# Altium PCB machin.PcbDoc
Units mil, origin at the board's own origin, x right, y up, seen from the top; angles counter-clockwise.
Board outline 5511.81 x 3543.31 mil, 2 copper layers (Top Layer, Bottom Layer); 28 components, 36 nets, 129 pads, 2 vias.
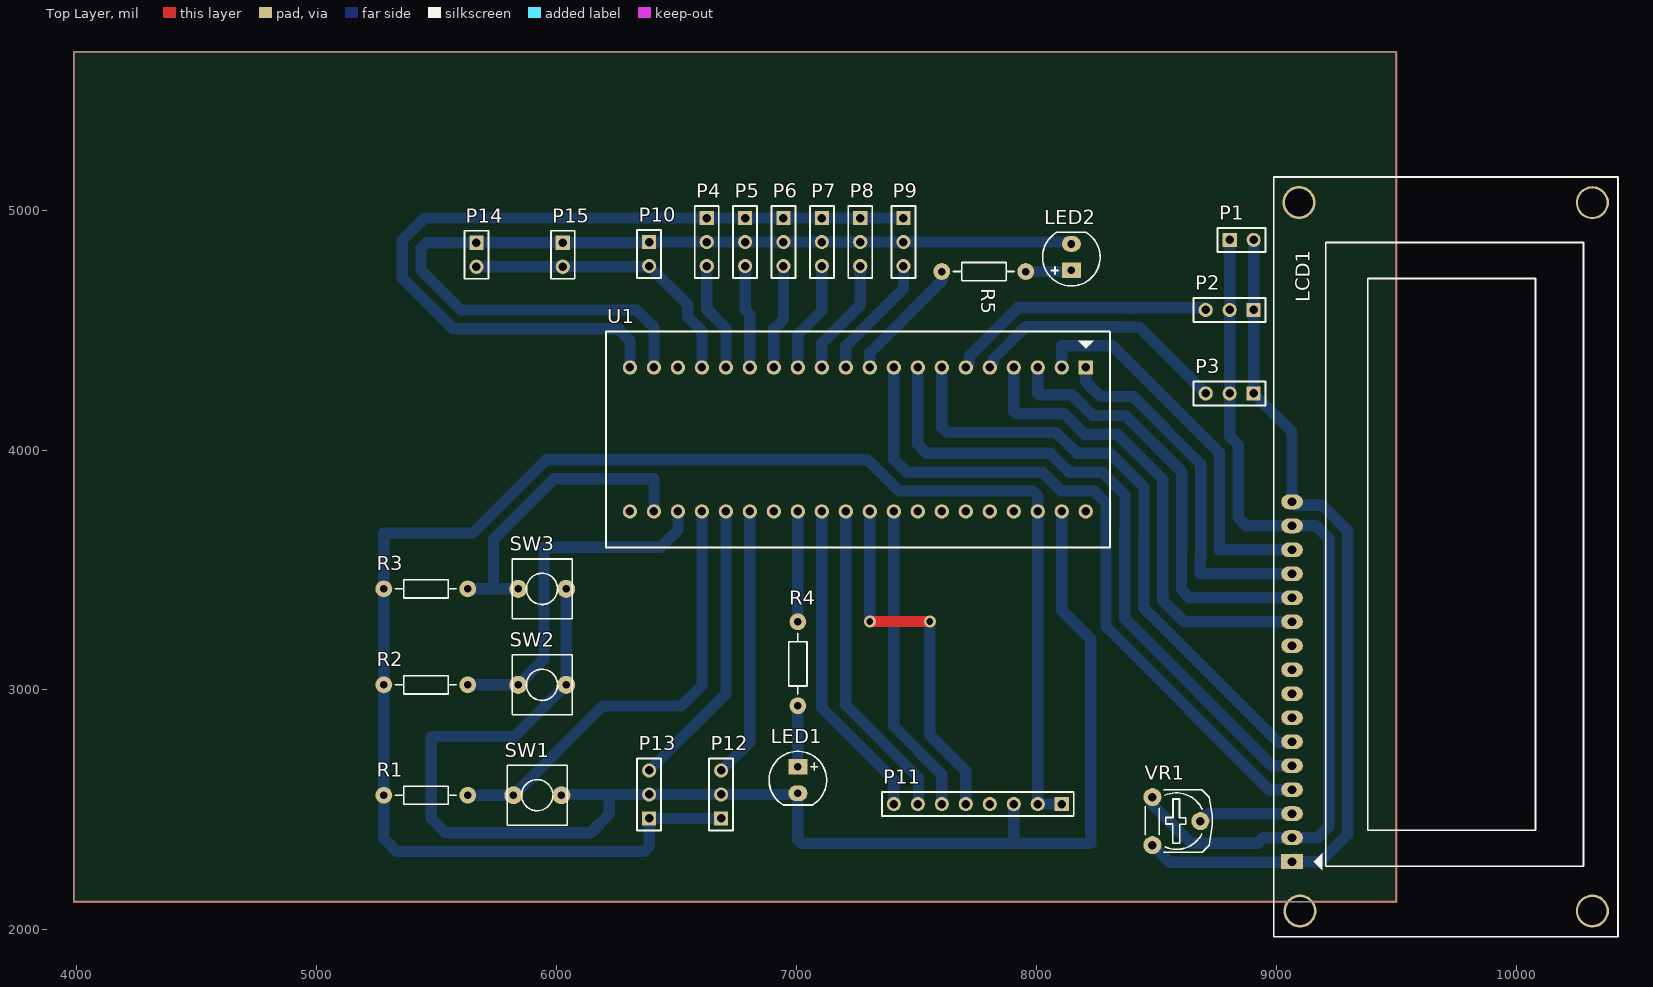
[diagram p0: Top Layer view]
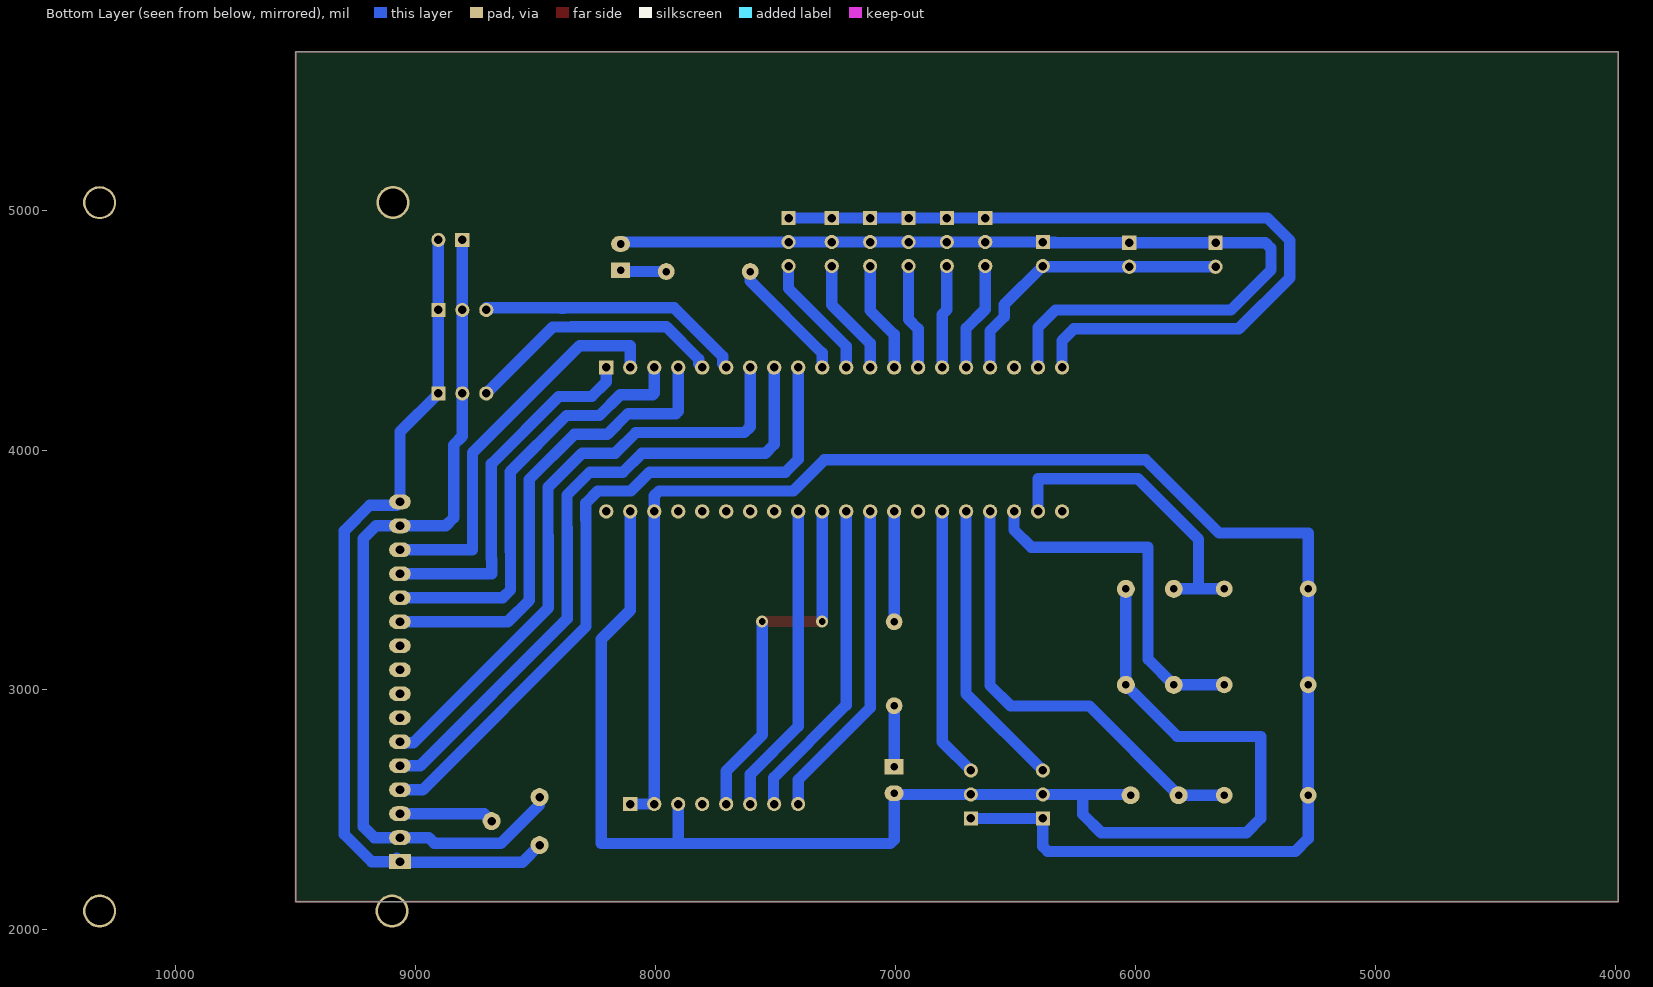
[diagram p1: Bottom Layer view, seen from below]

## Layer stack, top to bottom
Top Layer: signal copper 1.4
Dielectric: dielectric 12.6, FR-4, Dk 4.8
Bottom Layer: signal copper 1.4

## Board outline
3988.1,2116.1 9499.91,2116.1 9499.91,5659.41 3988.1,5659.41

## Design rules (kind name [scope] priority, off if disabled: settings)
Clearance [All] p1: gap=31.5
PolygonConnect [All] p1: connectstyle=Relief reliefconductorwidth=10 reliefentries=4 polygonreliefangle="90 Angle"
RoutingLayers [All] p1: top layer_v5=FALSE bottom layer_v5=TRUE
RoutingVias [All] p1: holewidth=28 width=50 viastyle="Through Hole" minholewidth=28 minwidth=50 maxholewidth=28 maxwidth=50
SilkscreenOverComponentPads [All] p1: minsilkscreentomaskgap=10
SolderMaskExpansion [All] p1: expansion=4
Width NET [All] p1: maxlimit=47.24 minlimit=47.24 preferedwidth=47.24
26 further rules are at their usual default settings.

## Components (designator, comment, footprint, x,y, rotation, side; value= is the part's Value field where it differs from the comment)
LCD1 "LCD_16x2" LCD16X2 9066,2284 r90 top
LED1 "LED_Ban_Dem" LED-5 7006,2624 r270 top
LED2 "LED_Nguon" LED-5 8146,4804 r90 top
P1 "5V" HDR1X2 8806,4876 r0 top
P2 "Servo_Ra" HDR1X3 8906,4584 r180 top
P3 "Servo_Vao" HDR1X3 8906,4236 r180 top
P4 "Vi_tri_6" HDR1X3 6626,4967 r270 top
P5 "Vi_tri_5" HDR1X3 6786,4967 r270 top
P6 "Vi_tri_4" HDR1X3 6946,4967 r270 top
P7 "Vi_tri_3" HDR1X3 7106,4967 r270 top
P8 "Vi_tri_2" HDR1X3 7266,4967 r270 top
P9 "Vi_tri_1" HDR1X3 7446,4967 r270 top
P10 "Coi_Bao_1" HDR1X2 6386,4867 r270 top
P11 "RC522" HDR1X8 8106,2524 r180 top
P12 "SS_Ban_Dem" HDR1X3 6686,2464 r90 top
P13 "SS_Lua" HDR1X3 6386,2464 r90 top
P14 "Coi_Bao_2" HDR1X2 5666,4864 r270 top
P15 "Den_Bao" HDR1X2 6026,4864 r270 top
R1 "1k" R1/4W 5280,2561 r0 top
R2 "1k" R1/4W 5280,3021 r0 top
R3 "1k" R1/4W 5280,3421 r0 top
R4 "1k" R1/4W 7006,3284 r270 top
R5 "1k" R1/4W 7606,4744 r0 top
SW1 "BTN_Back" SW2 5820,2561 r0 top
SW2 "BTN_Menu" SW2 5840,3021 r0 top
SW3 "BTN_Exit" SW2 5840,3421 r0 top
U1 "STM32F103C8T6" STM32L103C8_mini 8206,4344 r270 top
VR1 "100K" VR 8484,2553 r270 top

## Footprints (in the part's own frame and the unit in brackets; to place one, negate y for a bottom-side part, rotate by r counter-clockwise, add the part's x,y. Pads: shape width x height; smd on the part's side, far side on the other; paste and mask are expansions set on the pad)
HDR1X2 [mm] "Connector; Header; 2 Position"
  rect 1.5x1.5 hole 0.9: 1(0,0)
  round 1.5 hole 0.9: 2(2.54,0)
  silkscreen extent -1.27,-1.27 3.81,1.27
HDR1X3 [mm] "Connector; Header; 3 Position"
  rect 1.5x1.5 hole 0.9: 1(0,0)
  round 1.5 hole 0.9: 2(2.54,0) 3(5.08,0)
  silkscreen extent -1.27,-1.27 6.35,1.27
HDR1X8 [mm] "Connector; Header; 8 Position"
  rect 1.5x1.5 hole 0.9: 1(0,0)
  round 1.5 hole 0.9: 2(2.54,0) 3(5.08,0) 4(7.62,0) 5(10.16,0) 6(12.7,0) 7(15.24,0) 8(17.78,0)
  silkscreen extent -1.27,-1.27 19.05,1.27
LCD16X2 [mil] "LCD dipslay 16x2, 16 pin"
  rect 62x90 hole 36: 1(0,0)
  oval 62x90 hole 36: 2(100,0) 3(200,0) 4(300,0) 5(400,0) 6(500,0) 7(600,0) 8(700,0) 9(800,0) 10(900,0) 11(1000,0) 12(1100,0) 13(1200,0) 14(1300,0) 15(1400,0) 16(1500,0)
  round 137.8 hole 118.11: "Hole 0"(-206,-33) "Hole 0"(-206,-1252) "Hole 0"(2747,-1252) "Hole 0"(2748,-29)
  silkscreen extent -313,-1359 2854,76, body extent -315,-1360 2855,77, height 414
LED-5 [mil] "LED 2 PIN, 5 ly , Only colour, pin to pin 110mil"
  rect 65x80 hole 32: 1(-55,0)
  oval 65x80 hole 32: 2(55,0)
  silkscreen extent -120,-120 104,120, body extent -100,-101 101,100, height 339
R1/4W [mil] "R 1/4W, 2 Pin, 350mil"
  round 70 hole 31: 1(0,0) 2(350,0)
  silkscreen extent 48,-38 302,38, body extent -40,-47 386,47, height 111
STM32L103C8_mini [mil] "STM32L103C8_mini Board"
  rect 60x60 hole 35.43: 1(0,0)
  round 60 hole 35.43: 2(0,-100) 3(0,-200) 4(0,-300) 5(0,-400) 6(0,-500) 7(0,-600) 8(0,-700) 9(0,-800) 10(0,-900) 11(0,-1000) 12(0,-1100) 13(0,-1200) 14(0,-1300) 15(0,-1400) 16(0,-1500) 17(0,-1600) 18(0,-1700) 19(0,-1800) 20(0,-1900) 21(600,-1900) 22(600,-1800) 23(600,-1700) 24(600,-1600) 25(600,-1500) 26(600,-1400) 27(600,-1300) 28(600,-1200) 29(600,-1100) 30(600,-1000) 31(600,-900) 32(600,-800) 33(600,-700) 34(600,-600) 35(600,-500) 36(600,-400) 37(600,-300) 38(600,-200) 39(600,-100) 40(600,0)
  silkscreen extent -150,-2000 750,101
SW2 [mil] "SW button 2pin, 250x 250 mil"
  round 75 hole 31: 1(0,0) 2(200,0)
  silkscreen extent -25,-125 225,125, body extent -46,-125 265,119, height 276
VR [mil] "Resistor Variable"
  round 75 hole 35: 1(0,0) 2(100,200) 3(200,0)
  silkscreen extent -31,-30 230,250

## Part data
LCD1: library part LCD16x2, "LCD dipslay 16 char, 2 line"
LED1 LED2: library part LED, "LED Single colour Green and Red"
P1 P10 P14 P15: library part "Header 2", "Header, 2-Pin"
P2 P3 P4 P5 P6 P7 P8 P9 P12 P13: library part "Header 3", "Header, 3-Pin"
P11: library part "Header 8", "Header, 8-Pin"
R1 R2 R3 R4 R5: library part R1/4W, "Resistor 1/4W"
SW1 SW2 SW3: library part SW2, "Switch button 2 pin"
U1: library part STM32L103C8_mini, "STM32F103C8T6 Mini Board"
VR1: library part VR, "Var Resistor"

## Via types
v1: diameter 50, hole 28, Top Layer to Bottom Layer, 2 vias

## Nets (pads, with @x,y where several pads share a name; then routed paths per layer and width w, separated by ;. In a path a pad name is that pad's centre, name@x,y a point inside that pad or via, vN(x,y) a via of type N, cw(c..) or ccw(c..) an arc to the next point about the centre after c; other vN are vias at no path point)
NetLCD1_1: LCD1.1 LCD1.16 P1.2 P2.1 P3.1 VR1.3 | length 3617
  Bottom Layer w47.24: VR1.3 8555.36,2281.64 9063.64,2281.64 LCD1.1 ; P1.2 8906,4576 P3.1 9066,4076 LCD1.16 9079.88,3770.12 9191.24,3770.12 9297.74,3663.62 9297.74,2397.38 9184.36,2284 LCD1.1 ; LCD1.1@9079.88,2297.88 LCD1.1
NetLCD1_2: LCD1.2 LCD1.15 P1.1 P2.2 P3.2 VR1.1 | length 3649.9
  Bottom Layer w47.24: VR1.1 8484,2521 8644.62,2360.38 8922.38,2360.38 8946,2384 LCD1.2 9173,2384 9219,2430 9219,3631 9166,3684 LCD1.15 8875,3684 8842.3,3716.7 8842.3,4021.06 8806,4057.36 P3.2 P2.2 P1.1
NetLCD1_3: LCD1.3 VR1.2 | length 394.8
  Bottom Layer w47.24: VR1.2 8715,2484 LCD1.3
NetLCD1_4: LCD1.4 U1.9 | length 2916.4
  Bottom Layer w47.24: U1.9 7406,3961 7459.03,3907.97 8024.96,3907.97 8103.82,3829.12 8241.26,3829.12 8291.12,3779.26 8291.12,3708.74 8290.27,3707.89 8290.27,3264.02 8970.29,2584 LCD1.4
NetLCD1_5: LCD1.5 U1.8 | length 2738.6
  Bottom Layer w47.24: U1.8 7506,4023 7542.28,3986.72 8057.57,3986.72 8136.43,3907.86 8273.87,3907.86 8369.86,3811.87 8369.86,3676.13 8369.04,3675.31 8369.04,3296.61 8981.64,2684 LCD1.5
NetLCD1_6: LCD1.6 U1.7 | length 2550.6
  Bottom Layer w47.24: U1.7 7606,4097 7630,4073 8082.64,4073 8169.05,3986.6 8306.49,3986.6 8448.6,3844.49 8448.6,3643.51 8447.78,3642.69 8447.78,3341.22 9009.5,2779.5 9061.5,2779.5 LCD1.6
NetLCD1_11: LCD1.11 U1.4 | length 2002.1
  Bottom Layer w47.24: U1.4 7906,4161.26 7915.52,4151.74 8115.26,4151.74 8201.66,4065.34 8339.1,4065.34 8527.34,3877.1 8527.34,3610.9 8526.52,3610.08 8526.52,3373.84 8616.36,3284 LCD1.11
NetLCD1_12: LCD1.12 U1.3 | length 1868.8
  Bottom Layer w47.24: U1.3 8006,4236 8011.52,4230.48 8147.88,4230.48 8234.28,4144.08 8371.72,4144.08 8606.08,3909.72 8606.08,3578.28 8605.26,3577.46 8605.26,3416.74 8638,3384 8850,3384 ; 8792,3384 8850,3384 ; LCD1.12 8850,3384
NetLCD1_13: LCD1.13 U1.1 | length 1521.2
  Bottom Layer w47.24: U1.1 8206,4283.71 8266.89,4222.82 8404.33,4222.82 8684.82,3942.33 8684.82,3545.67 8684,3544.85 8684,3484 LCD1.13
NetLCD1_14: LCD1.14 U1.2 | length 1640.4
  Bottom Layer w47.24: U1.2 8106,4435 8317,4435 8763.56,3988.44 8763.56,3584 LCD1.14
NetLED1_1: LED1.1 R4.2 | length 255
  Bottom Layer w47.24: LED1.1 R4.2
NetLED1_2: LED1.2 P11.3 P12.2 P13.2 SW1.2 SW2.2 SW3.2 U1.39 | length 6274.4
  Bottom Layer w47.24: SW1.2 6023,2564 6220,2564 ; SW3.2 SW2.2 5825,2806 5478,2806 5478,2463.74 5537,2404.74 6142.74,2404.74 6220,2482 6220,2564 ; P11.3 7906,2360 7021,2360 7006,2375 LED1.2 7001,2564 P12.2 P13.2 6220,2564 ; 7914,2360 8227,2360 8227,3211 8106,3332 U1.39
NetLED2_1: LED2.1 R5.2 | length 192.1
  Bottom Layer w47.24: R5.2 8141,4744 LED2.1
NetLED2_2: LED2.2 P4.2 P5.2 P6.2 P7.2 P8.2 P9.2 P10.1 P14.1 P15.1 U1.19 | length 4109.4
  Bottom Layer w47.24: 6336,4867 P10.1 ; U1.19@6411,4349 U1.19 6406,4511 6333,4584 5602,4584 5435,4751 5435,4840.64 5458.36,4864 P14.1 P15.1 6383,4864 P10.1 ; LED2.2 8138,4867 P9.2 P8.2 P7.2 P6.2 P5.2 P4.2 P10.1
NetP2_3: P2.3 U1.6 | length 1133.2
  Bottom Layer w47.24: U1.6 7720.88,4358.88 7720.88,4390.61 7922.75,4592.48 8382.23,4592.48 ; 8393.48,4591.48 8383.23,4591.48 8382.23,4592.48 ; P2.3@8706,4592.48 8382.23,4592.48
NetP3_3: P3.3 U1.5 | length 1097.3
  Bottom Layer w47.24: U1.5 7820.88,4358.88 7820.88,4379.26 7955.36,4513.74 8349.62,4513.74 8350.62,4512.74 8429.26,4512.74 P3.3
NetP4_1: P4.1 P5.1 P6.1 P7.1 P8.1 P9.1 U1.20 | length 3609.7
  Bottom Layer w47.24: 5732,4967 5807,4967 ; 5889,4967 5945,4967 ; 6286,4967 6311,4967 ; U1.20 6306,4455.74 6256.48,4505.26 5569.38,4505.26 5356.26,4718.38 5356.26,4873.26 5450,4967 5807,4967 ; P9.1 P8.1 P7.1 P6.1 P5.1 P4.1 6311,4967 ; 5807,4967 5945,4967 ; 5945,4967 6311,4967
NetP4_3: P4.3 U1.16 | length 456.1
  Bottom Layer w47.24: P4.3 6626,4587 6706,4507 U1.16
NetP5_3: P5.3 U1.15 | length 431.3
  Bottom Layer w47.24: P5.3 6786,4585 6806,4565 U1.15
NetP6_3: P6.3 U1.14 | length 439.6
  Bottom Layer w47.24: U1.14 6906,4505 6946,4545 P6.3
NetP7_3: P7.3 U1.13 | length 464.4
  Bottom Layer w47.24: U1.13 7006,4482 7106,4582 P7.3
NetP8_3: P8.3 U1.12 | length 489.3
  Bottom Layer w47.24: U1.12 7106,4445 7266,4605 P8.3
NetP9_3: P9.3 U1.11 | length 522.4
  Bottom Layer w47.24: U1.11 7206,4433 7446,4673 P9.3
NetP10_2: P10.2 P14.2 P15.2 U1.17 | length 1235.4
  Bottom Layer w47.24: P14.2 P15.2 6383,4764 P10.2 6547.26,4605.74 6547.26,4554.38 6606,4495.64 U1.17
NetP11_1: P11.1 P11.2 P12.1 P13.1 R1.1 R2.1 R3.1 U1.38 | length 7127.6
  Bottom Layer w47.24: P12.1 P13.1 6386,2347 6365,2326 5334,2326 5280,2380 R1.1 R2.1 R3.1 5280,3654.17 5651.81,3654.17 5956.38,3958.74 7296.9,3958.74 7426.41,3829.23 7986,3829.23 8006,3809.23 U1.38 P11.2 P11.1
NetP11_5: P11.5 U1.31 | length 1532.1
  Top Layer w47.24: v1(7306,3285) v1(7556,3285)
  Bottom Layer w47.24: v1(7306,3285) U1.31 ; v1(7556,3285) 7556,2812 7706,2662 P11.5
NetP11_6: P11.6 U1.32 | length 1302.8
  Bottom Layer w47.24: U1.32 7406,2847.71 7606,2647.71 P11.6
NetP11_7: P11.7 U1.30 | length 1346.7
  Bottom Layer w47.24: U1.30 7206,2936.36 7509,2633.36 7509,2527 P11.7
NetP11_8: P11.8 U1.29 | length 1344.3
  Bottom Layer w47.24: U1.29 7106,2925 7406,2625 P11.8
NetP12_3: P12.3 U1.26 | length 1129.7
  Bottom Layer w47.24: P12.3 6806,2784 U1.26
NetP13_3: P13.3 U1.25 | length 1212.5
  Bottom Layer w47.24: P13.3 6706,2984 U1.25
NetR1_2: R1.2 SW1.1 U1.24 | length 1890.7
  Bottom Layer w47.24: R1.2 SW1.1 6192,2933 6520,2933 6606,3019 U1.24
NetR2_2: R2.2 SW2.1 U1.23 | length 1493.9
  Bottom Layer w47.24: R2.2 SW2.1 5947.38,3128.38 5947.38,3595 6434,3595 6506,3667 U1.23
NetR3_2: R3.2 SW3.1 U1.22 | length 1326.4
  Bottom Layer w47.24: R3.2 5737,3421 ; SW3.1 5737,3421 ; U1.22 6406,3880 5989,3880 5737,3628 5737,3421
NetR4_1: R4.1 U1.28 | length 460
  Bottom Layer w47.24: R4.1 U1.28
NetR5_1: R5.1 U1.10 | length 524.3
  Bottom Layer w47.24: U1.10 7306,4405 7606,4705 R5.1
pads on no net: "LCD1.Hole 0" LCD1.7 LCD1.8 LCD1.9 LCD1.10 P11.4 U1.18 U1.21 U1.27 U1.33 U1.34 U1.35 U1.36 U1.37 U1.40
copper on no net: | length 18110.2
  Top Layer w10: 3988.1,2116.1 3988.1,5659.41 9499.91,5659.41 9499.91,2116.1 3988.1,2116.1